# Altium PCB 3S Battery PCB.PcbDoc
Units mm, origin at the board's own origin, x right, y up, seen from the top; angles counter-clockwise.
Board outline 40 x 35 mm, 2 copper layers (Top Layer, Bottom Layer), stack 1.671 mm thick; 27 components, 18 nets, 89 pads, 8 vias.
Unrouted connection lines stored in the file: 1.
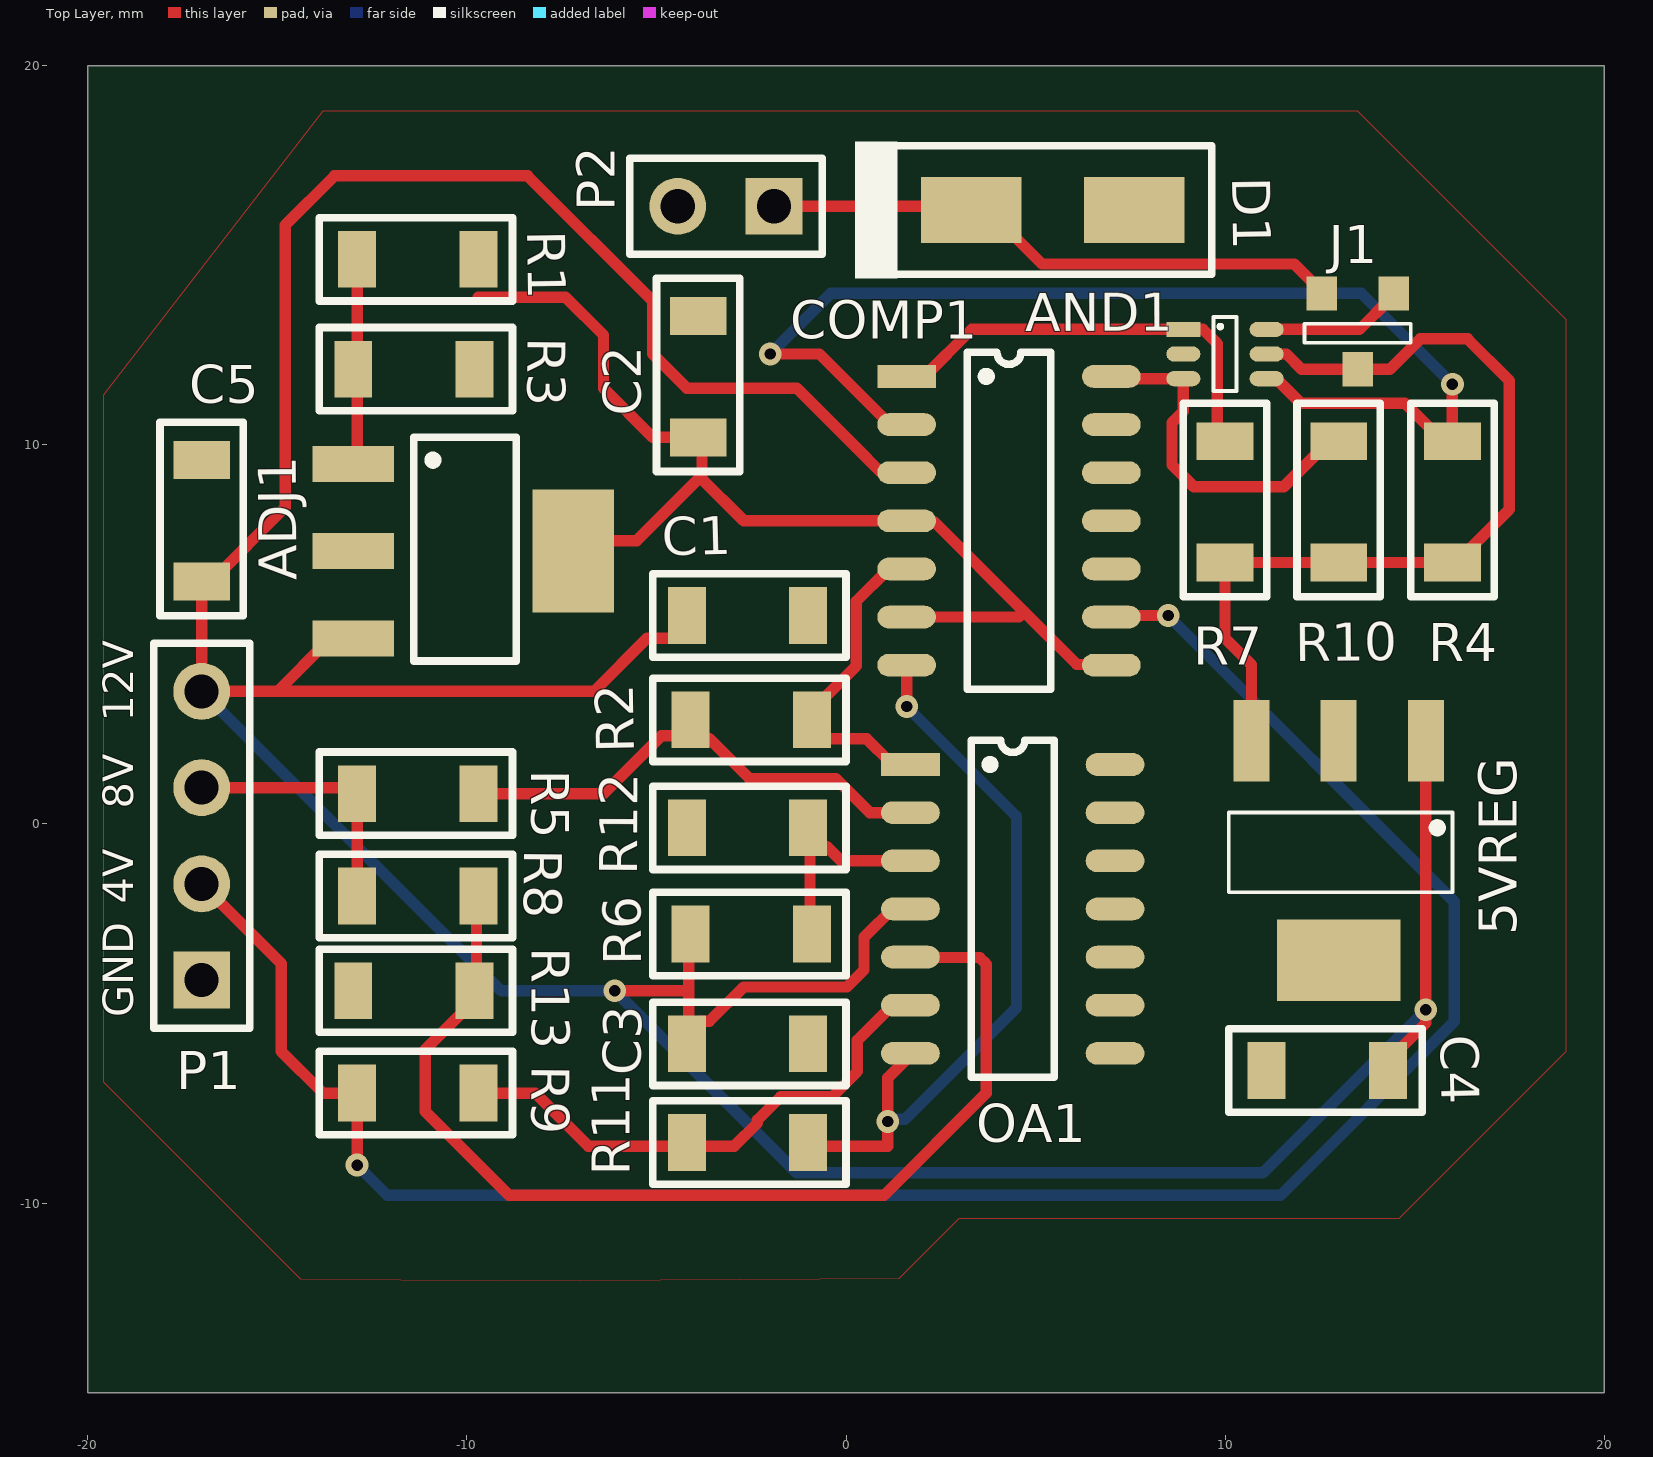
[diagram p0: Top Layer view]
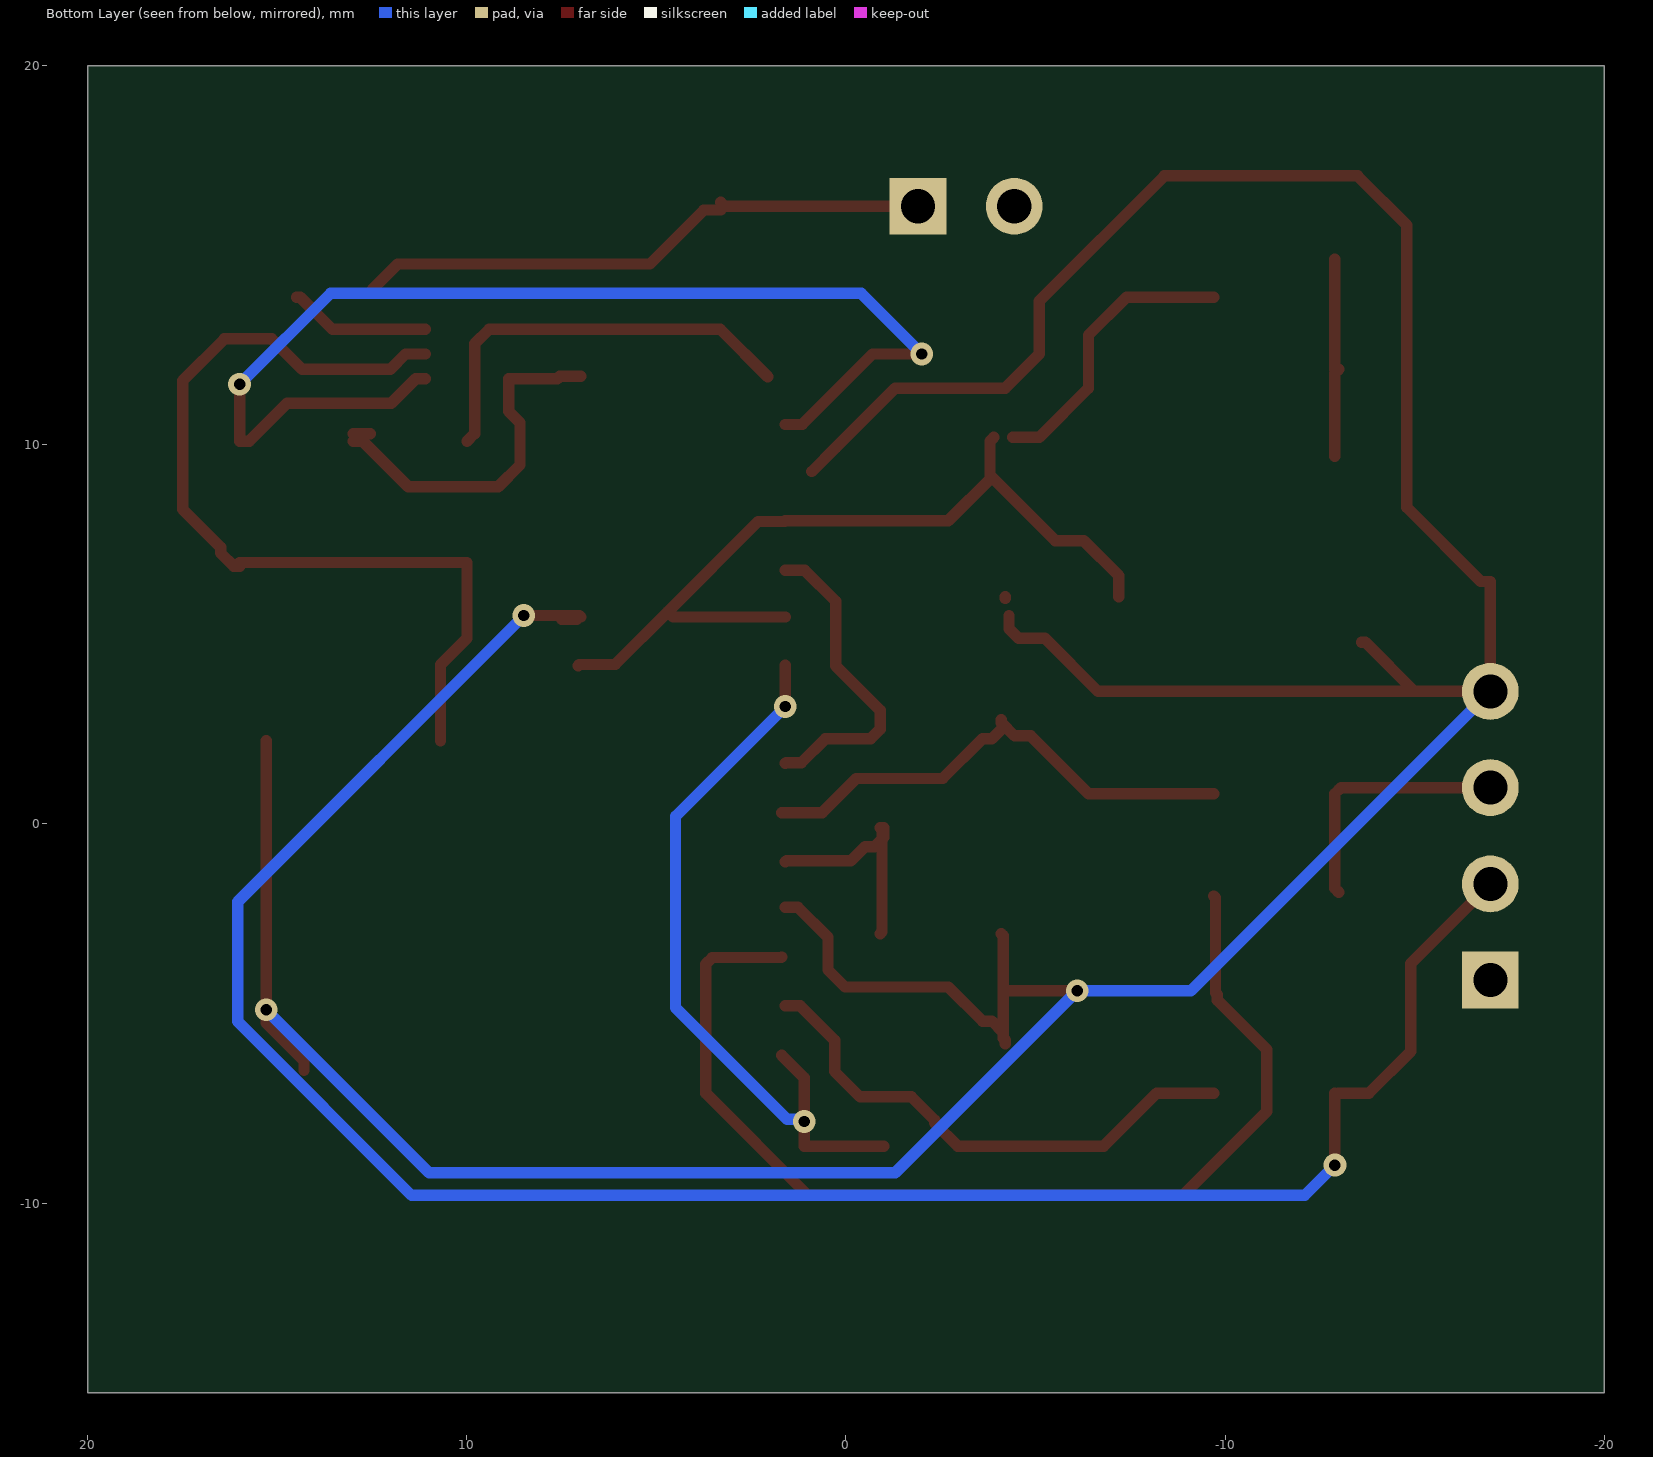
[diagram p1: Bottom Layer view, seen from below]
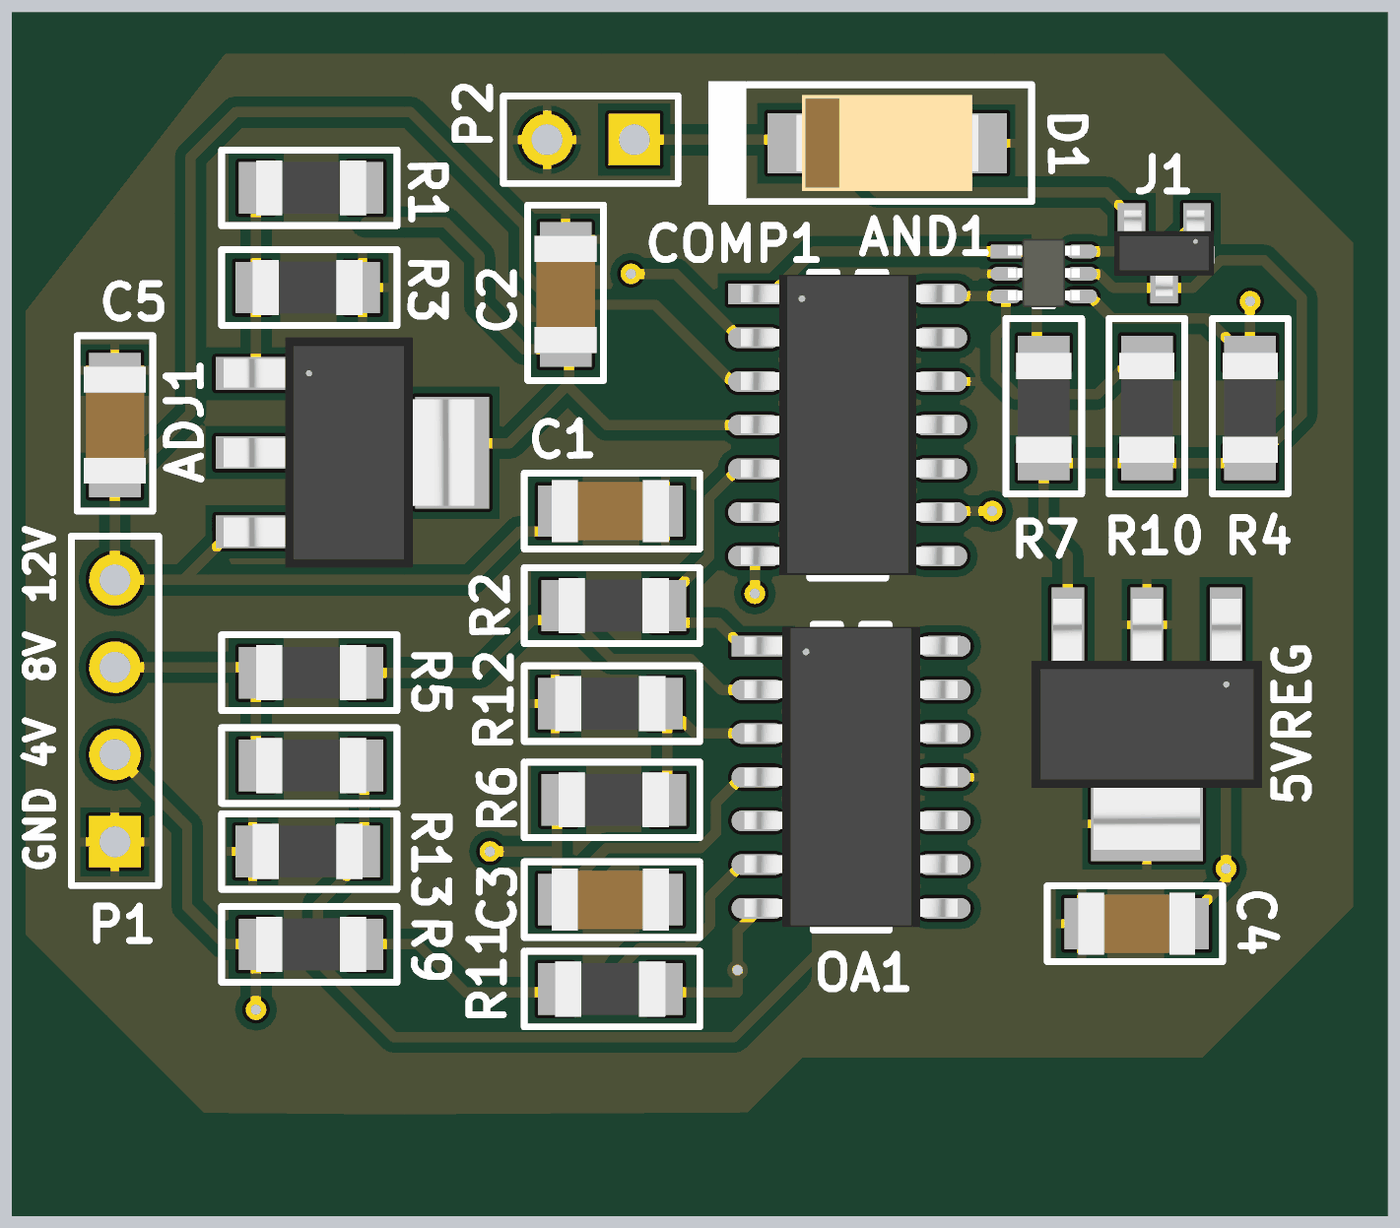
[diagram p2: 3D render of the assembled board from above, using the file's embedded part models]

## Layer stack, top to bottom
Top Solder: solder mask 0.0102, Solder Resist, Dk 3.5
Top Layer: signal copper 0.0356
Dielectric 1: dielectric 1.6, FR-4, Dk 4.8
Bottom Layer: signal copper 0.0356
Bottom Solder: solder mask 0.0102, Solder Resist, Dk 3.5

## Board outline
-20,20 -20,-15 20,-15 20,20

## Design rules (kind name [scope] priority, off if disabled: settings)
Clearance [All] p1: gap=0.3 ignorepadtopadclearanceinfootprint=FALSE
PolygonConnect [All] p1: connectstyle=Relief reliefconductorwidth=0.254 reliefentries=4 polygonreliefangle="90 Angle" airgapwidth=0.254
RoutingVias [All] p1: holewidth=0.3 width=0.6 viastyle="Through Hole" minholewidth=0.3 minwidth=0.6 maxholewidth=0.3 maxwidth=0.6
SolderMaskExpansion [All] p1: expansion=0.102 istentingtop=FALSE
Width [All] p1: maxlimit=1 minlimit=0.3 preferedwidth=0.5
30 further rules are at their usual default settings.

## Components (designator, comment, footprint, x,y, rotation, side; value= is the part's Value field where it differs from the comment)
5VREG "5V REG" 5VREG 13,2.2 r180 top
ADJ1 "ADJ REG" ADJREG -13,7.2 r270 top
AND1 "AND GATE" AND3 8.9,13.05 r0 top
C1 "0.1uF" C1206 -2.6,5.5 r180 top
C2 "1uF" C1206 -3.9,11.8 r270 top
C3 "0.1uF" C1206 -2.6,-5.8 r180 top
C4 "0.1uF" C1206 12.7,-6.5 r0 top
C5 "0.1uF" C1206 -17,8 r270 top
COMP1 "COMPARATOR" Comparator 1.6,11.81 r0 top
D1 "Diode" Diode 5.45,16.2 r180 top
J1 "FET" MOSFET 13.5,12 r180 top
OA1 "OP-AMP" OP_AMP 1.7,1.57 r0 top
P1 "Header 4" HDR1X4 -17,-4.12 r90 top
P2 "Relay" HDR1X2 -1.9,16.3 r180 top
R1 "330R" R1206 -11.3,14.9 r0 top
R2 "1K" R1206 -2.5,2.75 r0 top
R3 "620R" R1206 -11.4,12 r180 top
R4 "47K" R1206 16,8.5 r270 top
R5 "1K" R1206 -11.3,0.8 r0 top
R6 "1K" R1206 -2.5,-2.9 r0 top
R7 "47K" R1206 10,8.5 r270 top
R8 "1K" R1206 -11.3,-1.9 r0 top
R9 "1K" R1206 -11.3,-7.1 r0 top
R10 "47K" R1206 13,8.5 r270 top
R11 "1K" R1206 -2.6,-8.4 r180 top
R12 "1K" R1206 -2.6,-0.1 r180 top
R13 "1K" R1206 -11.4,-4.4 r180 top

## Footprints (in the part's own frame and the unit in brackets; to place one, negate y for a bottom-side part, rotate by r counter-clockwise, add the part's x,y. Pads: shape width x height; smd on the part's side, far side on the other; paste and mask are expansions set on the pad)
5VREG [mm]
  rect 0.95x2.15 smd: 1(-2.3,0) 2(0,0) 3(2.3,0)
  rect 3.25x2.15 smd: 4(0,5.8)
  silkscreen extent -3,1.9 2.9,4, body extent -3.35,-0.74 3.35,6.55, height 1.7
ADJREG [mm]
  rect 0.95x2.15 smd: 1(-2.3,0) 2(0,0) 3(2.3,0)
  rect 3.25x2.15 smd: 4(0,5.8)
  silkscreen extent -3,1.6 2.9,4.3, body extent -3.35,-0.84 3.35,6.45, height 1.7
AND3 [mm]
  rect 0.9x0.4 smd: 1(0,0)
  oval 0.9x0.4 smd: 2(0,-0.65) 3(0,-1.3) 4(2.2,-1.3) 5(2.2,-0.65) 6(2.2,0)
  silkscreen extent 0.8,-1.63 1.4,0.33, body extent 0.05,-1.62 2.15,0.38, height 1
C1206 [mm]
  rect 1x1.5 smd: 1(-1.6,0) 2(1.6,0)
  silkscreen extent -2.6,-1.1 2.5,1.1, body extent -1.7,-0.9 1.7,0.9, height 0.88
Comparator [mm]
  rect 1.55x0.6 smd: 1(0,0)
  oval 1.55x0.6 smd: 2(0,-1.27) 3(0,-2.54) 4(0,-3.81) 5(0,-5.08) 6(0,-6.35) 7(0,-7.62) 8(5.4,-7.62) 9(5.4,-6.35) 10(5.4,-5.08) 11(5.4,-3.81) 12(5.4,-2.54) 13(5.4,-1.27) 14(5.4,0)
  silkscreen extent 1.6,-8.25 3.8,0.64, body extent -0.4,-8.17 5.8,0.57, height 1.76
Diode [mm]
  rect 2.65x1.75 smd: 1(2.15,0) 2(-2.15,0)
  silkscreen extent -4.2,-1.8 5.2,1.8, body extent -2.64,-1.4 2.64,1.4, height 2.34
HDR1X2 [mm] "Connector; Header; 2 Position"
  rect 1.5x1.5 hole 0.9: 1(0,0)
  round 1.5 hole 0.9: 2(2.54,0)
  silkscreen extent -1.27,-1.27 3.81,1.27
HDR1X4 [mm] "Connector; Header; 4 Position"
  rect 1.5x1.5 hole 0.9: 1(0,0)
  round 1.5 hole 0.9: 2(2.54,0) 3(5.08,0) 4(7.62,0)
  silkscreen extent -1.27,-1.27 8.89,1.27
MOSFET [mm]
  rect 0.8x0.9 smd: 1(-0.95,-2) 2(0,0) 3(0.95,-2)
  silkscreen extent -1.4,-1.2 1.4,-0.7, body extent -1.45,-2.24 1.45,0.25, height 1.09
OP_AMP [mm]
  rect 1.55x0.6 smd: 1(0,0)
  oval 1.55x0.6 smd: 2(0,-1.27) 3(0,-2.54) 4(0,-3.81) 5(0,-5.08) 6(0,-6.35) 7(0,-7.62) 8(5.4,-7.62) 9(5.4,-6.35) 10(5.4,-5.08) 11(5.4,-3.81) 12(5.4,-2.54) 13(5.4,-1.27) 14(5.4,0)
  silkscreen extent 1.6,-8.25 3.8,0.64, body extent -0.4,-8.17 5.8,0.57, height 1.76
R1206 [mm]
  rect 1x1.5 smd: 1(-1.6,0) 2(1.6,0)
  silkscreen extent -2.6,-1.1 2.5,1.1, body extent -1.6,-0.8 1.6,0.8, height 0.71

## Part data
5VREG: library part LM7805MPX/NOPB, "IC REG LINEAR 5V 1.5A SOT223-4", Dropout Voltage=2V, Manufacturer="Texas Instruments", Max Operating Temperature=125°C, Min Operating Temperature=0°C, Quiescent Current=8mA, Supplier Part Number 1=296-44518-1-ND, Category="Voltage Regulators - Linear", Lead Free="Lead Free", Manufacturer Part Number=LM7805MPX/NOPB, Pricing 1="1=1.32000, 10=1.18000, 25=1.12000, 100=0.86000, 250=0.76000, 500=0.72000, 1000=0.56000 (USD)", RoHS=No, Stock 1=3420, Supplier 1=Digi-Key
ADJ1: library part LM317DCYR, "TEXAS INSTRUMENTS - LM317DCYR - LINEAR VOLT REG, 1.5A, 1.25V-37V, SOT223", Case/Package=SOT-223, Dropout Voltage=2V, Manufacturer="Texas Instruments", Max Input Voltage=40V, Max Operating Temperature=125°C, Max Output Current=1.5A, Max Output Voltage=37V, Min Input Voltage=4.2V, Min Operating Temperature=0°C, Min Output Voltage=1.25V, Package Quantity=1, Power Supply Rejection Ratio (PSRR)=64dB, Quiescent Current=3.5mA, Reference Voltage=1.3V, Supplier Part Number 1=296-12602-1-ND, Category="Voltage Regulators - Linear", ComponentLink1Description=https://datasheet.ciiva.com/2042/lm317-2042144.pdf?src-supplier=Digi-Key, ComponentLink1URL=https://datasheet.ciiva.com/2042/lm317-2042144.pdf?src-supplier=Digi-Key, ComponentLink2Description=https://datasheet.ciiva.com/4882/slvs044u-120651-4882417.pdf?src-supplier=Mouser, ComponentLink2URL=https://datasheet.ciiva.com/4882/slvs044u-120651-4882417.pdf?src-supplier=Mouser, ComponentLink3Description=https://datasheet.ciiva.com/41458/001014031-da-01-en-ic-reg-adj-1-5a-lm317dcyr-sot-223-4-tid-41458183.pdf?src-supplier=Conrad, ComponentLink3URL=https://datasheet.ciiva.com/41458/001014031-da-01-en-ic-reg-adj-1-5a-lm317dcyr-sot-223-4-tid-41458183.pdf?src-supplier=Conrad, ComponentLink4Description=https://datasheet.ciiva.com/2042/lm317-2042145.pdf?src-supplier=Digi-Key, ComponentLink4URL=https://datasheet.ciiva.com/2042/lm317-2042145.pdf?src-supplier=Digi-Key, ComponentLink5Description=https://datasheet.ciiva.com/2042/lm317-2042146.pdf?src-supplier=Digi-Key, ComponentLink5URL=https://datasheet.ciiva.com/2042/lm317-2042146.pdf?src-supplier=Digi-Key, ComponentLink6Description=https://datasheet.ciiva.com/46385/1885815-46385689.pdf?src-supplier=Element14, ComponentLink6URL=https://datasheet.ciiva.com/46385/1885815-46385689.pdf?src-supplier=Element14, Contact Plating=Tin,Matte, Height=1.6mm, Lead Free="Lead Free", Length=6.5mm, Manufacturer Part Number=LM317DCYR, Mount="Surface Mount", Number of Outputs=1, Number of Pins=4, Number of Regulators=1, Output Current=1.5A, Output Type=Adjustable, Output Voltage=37V, Packaging="Tape and Reel", Polarity=Positive, Pricing 1="1=0.60000, 10=0.52800, 25=0.49600, 100=0.37600, 250=0.32000, 500=0.30400, 1000=0.23200 (USD)", Radiation Hardening=No, REACH SVHC="No SVHC", RoHS=Yes, Stock 1=100644, Supplier 1=Digi-Key, Weight=0.006632oz, Width=3.5mm
AND1: library part SN74LVC1G11DCKR, "IC GATE AND 1CH 3-INP SC-70-6", Case/Package=SC, High Level Output Current=-32mA, Low Level Output Current=32mA, Manufacturer="Texas Instruments", Max Operating Temperature=125°C, Max Supply Voltage=5.5V, Min Operating Temperature=-40°C, Min Supply Voltage=1.65V, Package Quantity=1, Quiescent Current=10uA, Supplier Part Number 1=296-18066-1-ND, Category="Logic Gates", ComponentLink1Description=https://datasheet.ciiva.com/4216/901sn74lvc1g11-4216653.pdf?src-supplier=Arrow, ComponentLink1URL=https://datasheet.ciiva.com/4216/901sn74lvc1g11-4216653.pdf?src-supplier=Arrow, ComponentLink2Description=https://datasheet.ciiva.com/34301/756561-34301472.pdf?src-supplier=Jameco, ComponentLink2URL=https://datasheet.ciiva.com/34301/756561-34301472.pdf?src-supplier=Jameco, ComponentLink3Description=https://datasheet.ciiva.com/15090/getdatasheetpartid-173081-15090972.pdf?src-supplier=Verical, ComponentLink3URL=https://datasheet.ciiva.com/15090/getdatasheetpartid-173081-15090972.pdf?src-supplier=Verical, ComponentLink4Description=https://datasheet.ciiva.com/14290/sn74lvc1g11-14290749.pdf?src-supplier=Avnet, ComponentLink4URL=https://datasheet.ciiva.com/14290/sn74lvc1g11-14290749.pdf?src-supplier=Avnet, ComponentLink5Description=https://datasheet.ciiva.com/1864/sn74lvc1g11-1864149.pdf?src-supplier=Digi-Key, ComponentLink5URL=https://datasheet.ciiva.com/1864/sn74lvc1g11-1864149.pdf?src-supplier=Digi-Key, ComponentLink6Description=https://datasheet.ciiva.com/1864/sn74lvc1g11-1864150.pdf?src-supplier=Digi-Key, ComponentLink6URL=https://datasheet.ciiva.com/1864/sn74lvc1g11-1864150.pdf?src-supplier=Digi-Key, ComponentLink7Description=https://datasheet.ciiva.com/1864/sn74lvc1g11-1864151.pdf?src-supplier=Digi-Key, ComponentLink7URL=https://datasheet.ciiva.com/1864/sn74lvc1g11-1864151.pdf?src-supplier=Digi-Key, ComponentLink8Description=https://datasheet.ciiva.com/26218/sn74lvc1g11-26218392.pdf?src-supplier=Avnet+Europe, ComponentLink8URL=https://datasheet.ciiva.com/26218/sn74lvc1g11-26218392.pdf?src-supplier=Avnet+Europe, ComponentLink9Description=https://datasheet.ciiva.com/7783/sn74lvc1g11-7783449.pdf?src-supplier=Element14, ComponentLink9URL=https://datasheet.ciiva.com/7783/sn74lvc1g11-7783449.pdf?src-supplier=Element14, ComponentLink10Description=https://datasheet.ciiva.com/28695/1882071-28695898.pdf?src-supplier=Element14, ComponentLink10URL=https://datasheet.ciiva.com/28695/1882071-28695898.pdf?src-supplier=Element14, ComponentLink11Description=https://datasheet.ciiva.com/46439/1856273-46439162.pdf?src-supplier=Element14, ComponentLink11URL=https://datasheet.ciiva.com/46439/1856273-46439162.pdf?src-supplier=Element14, ComponentLink12Description=https://datasheet.ciiva.com/46439/1856273-46439210.pdf?src-supplier=Element14, ComponentLink12URL=https://datasheet.ciiva.com/46439/1856273-46439210.pdf?src-supplier=Element14, Contact Plating=Gold, Height=0.9mm, Lead Free="Lead Free", Length=2mm, Logic Function=AND, Manufacturer Part Number=SN74LVC1G11DCKR, Mount="Surface Mount", Number of Bits=1, Number of Circuits=1, Number of Elements=1, Number of Gates=1, Number of Input Lines=3, Number of Inputs=3, Number of Output Lines=1, Number of Outputs=1, Number of Pins=6, Output Current=32mA, Packaging="Tape and Reel", Pricing 1="1=0.43000, 10=0.32000, 25=0.28000, 100=0.18120, 250=0.15000, 500=0.12000, 1000=0.09200 (USD)", Propagation Delay=3.5ns, Radiation Hardening=No, REACH SVHC="No SVHC", RoHS=Yes, Schmitt Trigger Input=No, Stock 1=75205, Supplier 1=Digi-Key, Turn-On Delay Time=4.9ns, Weight=8.8E-05oz, Width=1.25mm
C1 C3 C4 C5: library part C1206C104K5RAC-TU, "Kemet 0.1µF ±10% 50V dc X7R Dielectric SMD Ceramic Multilayer Capacitor; 1206 pa", Capacitance=100nF, Case Code (Imperial)=1206, Case Code (Metric)=3216, Dielectric=X7R, Dielectric Material=Ceramic, Manufacturer=KEMET, Max Operating Temperature=125°C, Min Operating Temperature=-55°C, Package Quantity=4000, Supplier Part Number 1=399-C1206C104K5RAC7800CT-ND, Tolerance=10%, Voltage=50V, Case/Package=1206, Category="Ceramic Capacitors", ComponentLink1Description=https://datasheet.ciiva.com/6125/1725438-6125494.pdf?src-supplier=Farnell, ComponentLink1URL=https://datasheet.ciiva.com/6125/1725438-6125494.pdf?src-supplier=Farnell, ComponentLink2Description=https://datasheet.ciiva.com/6125/kem-c1002-x7r-smd-6125493.pdf?src-supplier=Farnell, ComponentLink2URL=https://datasheet.ciiva.com/6125/kem-c1002-x7r-smd-6125493.pdf?src-supplier=Farnell, ComponentLink3Description=https://datasheet.ciiva.com/14584/70095383-14584998.pdf?src-supplier=Allied+Electronics, ComponentLink3URL=https://datasheet.ciiva.com/14584/70095383-14584998.pdf?src-supplier=Allied+Electronics, ComponentLink4Description=https://datasheet.ciiva.com/6094/kem-c1002-x7r-smd-6094137.pdf?src-supplier=Farnell, ComponentLink4URL=https://datasheet.ciiva.com/6094/kem-c1002-x7r-smd-6094137.pdf?src-supplier=Farnell, ComponentLink5Description=https://datasheet.ciiva.com/14589/70095383-14589050.pdf?src-supplier=Allied+Electronics, ComponentLink5URL=https://datasheet.ciiva.com/14589/70095383-14589050.pdf?src-supplier=Allied+Electronics, ComponentLink6Description=https://datasheet.ciiva.com/7729/1851736-7729804.pdf?src-supplier=Element14, ComponentLink6URL=https://datasheet.ciiva.com/7729/1851736-7729804.pdf?src-supplier=Element14, ComponentLink7Description=https://datasheet.ciiva.com/7730/kem-c1002-x7r-smd-7730076.pdf?src-supplier=Element14, ComponentLink7URL=https://datasheet.ciiva.com/7730/kem-c1002-x7r-smd-7730076.pdf?src-supplier=Element14, ComponentLink8Description=https://datasheet.ciiva.com/7729/1851736-7729805.pdf?src-supplier=Element14, ComponentLink8URL=https://datasheet.ciiva.com/7729/1851736-7729805.pdf?src-supplier=Element14, ComponentLink9Description=https://datasheet.ciiva.com/7730/kem-c1002-x7r-smd-7730077.pdf?src-supplier=Element14, ComponentLink9URL=https://datasheet.ciiva.com/7730/kem-c1002-x7r-smd-7730077.pdf?src-supplier=Element14, ComponentLink10Description=https://datasheet.ciiva.com/32426/slceramic-chip-condensers-e-32426463.pdf?src-supplier=Distrelec, ComponentLink10URL=https://datasheet.ciiva.com/32426/slceramic-chip-condensers-e-32426463.pdf?src-supplier=Distrelec, ComponentLink11Description=https://datasheet.ciiva.com/5423/kem-c1002-x7r-smd-5423254.pdf?src-supplier=Mouser, ComponentLink11URL=https://datasheet.ciiva.com/5423/kem-c1002-x7r-smd-5423254.pdf?src-supplier=Mouser, ComponentLink12Description=https://datasheet.ciiva.com/28682/1851736-28682249.pdf?src-supplier=Element14, ComponentLink12URL=https://datasheet.ciiva.com/28682/1851736-28682249.pdf?src-supplier=Element14, Contact Plating=Tin,Matte, Depth=1.6mm, Height=0.78mm, Length=3.2mm, Manufacturer Part Number=C1206C104K5RAC-TU, Mount="Surface Mount", Number of Pins=2, Packaging="Tape and Reel", Pricing 1="1=0.12000, 10=0.08400, 50=0.04760, 100=0.03950, 500=0.02768, 1000=0.02291 (USD)", Radiation Hardening=No, REACH SVHC="No SVHC", RoHS=Yes, Stock 1=1706426, Supplier 1=Digi-Key, Termination=SMD/SMT, Voltage Rating=50V, Voltage Rating (DC)=50V, Width=1.6mm
C2: library part C1206C105M4RACTU, "KEMET         C1206C105M4RACTU             SMD Multilayer Ceramic Capacitor, 1206 [3216 Metric], 1 F, 16 V,  20%, X7R, C Series                          New", Case Code (Imperial)=1206, Case Code (Metric)=3216, Dielectric=X7R, Dielectric Material=Ceramic, Manufacturer=KEMET, Max Operating Temperature=125°C, Min Operating Temperature=-55°C, Package Quantity=1, Supplier Part Number 1=399-8150-1-ND, Tolerance=20%, Voltage Rating=16V, Capacitance=1uF, Case/Package=1206, Category="Ceramic Capacitors", ComponentLink1Description=http://components.arrow.com/part/dataview/0323_00341530?src-supplier=Arrow+Europe, ComponentLink1URL=http://components.arrow.com/part/dataview/0323_00341530?src-supplier=Arrow+Europe, ComponentLink2Description=http://www.farnell.com/datasheets/2746114.pdf?src-supplier=Farnell, ComponentLink2URL=http://www.farnell.com/datasheets/2746114.pdf?src-supplier=Farnell, ComponentLink3Description=http://www.mouser.com/ds/2/212/KEM_C1002_X7R_SMD-1102033.pdf?src-supplier=Mouser, ComponentLink3URL=http://www.mouser.com/ds/2/212/KEM_C1002_X7R_SMD-1102033.pdf?src-supplier=Mouser, ComponentLink4Description=http://www.farnell.com/datasheets/2746114.pdf?src-supplier=Newark, ComponentLink4URL=http://www.farnell.com/datasheets/2746114.pdf?src-supplier=Newark, ComponentLink5Description=http://www.farnell.com/datasheets/1828800.pdf?src-supplier=Newark, ComponentLink5URL=http://www.farnell.com/datasheets/1828800.pdf?src-supplier=Newark, ComponentLink6Description=https://api.kemet.com/component-edge/download/datasheet/C1206C105M4RACTU.pdf?src-supplier=Digi-Key, ComponentLink6URL=https://api.kemet.com/component-edge/download/datasheet/C1206C105M4RACTU.pdf?src-supplier=Digi-Key, ComponentLink7Description=http://components.arrow.com/part/dataview/2096582S3494707N7429?src-supplier=Arrow, ComponentLink7URL=http://components.arrow.com/part/dataview/2096582S3494707N7429?src-supplier=Arrow, ComponentLink8Description=https://search.kemet.com/component-edge/download/datasheet/C1206C105M4RACTU.pdf?src-supplier=Digi-Key, ComponentLink8URL=https://search.kemet.com/component-edge/download/datasheet/C1206C105M4RACTU.pdf?src-supplier=Digi-Key, ComponentLink9Description=https://www.verical.com/server-webapp/html/getDatasheet?partID=110809&src-supplier=Verical, ComponentLink9URL=https://www.verical.com/server-webapp/html/getDatasheet?partID=110809&src-supplier=Verical, ComponentLink10Description=http://www.farnell.com/datasheets/2065007.pdf?src-supplier=Element14, ComponentLink10URL=http://www.farnell.com/datasheets/2065007.pdf?src-supplier=Element14, Depth=1.6mm, Height=1.2mm, Length=3.2mm, Manufacturer Part Number=C1206C105M4RACTU, Mount="Surface Mount", Packaging="Tape and Reel", Pricing 1="1=0.19000, 10=0.12600, 50=0.07560, 100=0.06390, 500=0.04372, 1000=0.03868 (USD)", Radiation Hardening=No, REACH SVHC="No SVHC", RoHS=Yes, Stock 1=36978, Supplier 1=Digi-Key, Termination=SMD/SMT, Thickness=0.055inch, Voltage Rating (DC)=16V, Width=0.063inch
COMP1: library part LM339DR, "Comparator Quad 15V/30V 14-Pin SOIC T/R", Case/Package=SOIC, Input Bias Current=250nA, Input Offset Voltage (Vos)=5mV, Manufacturer="Texas Instruments", Max Dual Supply Voltage=15V, Max Operating Temperature=70°C, Max Supply Current=500uA, Max Supply Voltage=30V, Min Dual Supply Voltage=1V, Min Operating Temperature=0°C, Min Supply Voltage=2V, Nominal Supply Current=2mA, Output Current=20mA, Output Current per Channel=6mA, Package Quantity=2500, Quiescent Current=2.5mA, Supplier Part Number 1=296-1013-1-ND, Voltage Gain=106.02dB, Category="Amplifiers - Op Amps, Buffer, Instrumentation", ComponentLink1Description=https://datasheet.ciiva.com/15131/getdatasheetpartid-242797-15131064.pdf?src-supplier=Verical, ComponentLink1URL=https://datasheet.ciiva.com/15131/getdatasheetpartid-242797-15131064.pdf?src-supplier=Verical, ComponentLink2Description=https://datasheet.ciiva.com/34301/902741-34301710.pdf?src-supplier=Jameco, ComponentLink2URL=https://datasheet.ciiva.com/34301/902741-34301710.pdf?src-supplier=Jameco, ComponentLink3Description=https://datasheet.ciiva.com/2970/lm2901-2970486.pdf?src-supplier=Avnet, ComponentLink3URL=https://datasheet.ciiva.com/2970/lm2901-2970486.pdf?src-supplier=Avnet, ComponentLink4Description=https://datasheet.ciiva.com/2970/lm2901-2970487.pdf?src-supplier=Avnet, ComponentLink4URL=https://datasheet.ciiva.com/2970/lm2901-2970487.pdf?src-supplier=Avnet, ComponentLink5Description=https://datasheet.ciiva.com/46390/1874704-46390521.pdf?src-supplier=Element14, ComponentLink5URL=https://datasheet.ciiva.com/46390/1874704-46390521.pdf?src-supplier=Element14, ComponentLink6Description=https://datasheet.ciiva.com/1483/1633630-1483053.pdf?src-supplier=Element14, ComponentLink6URL=https://datasheet.ciiva.com/1483/1633630-1483053.pdf?src-supplier=Element14, ComponentLink7Description=https://datasheet.ciiva.com/1827/lm139a-1827181.pdf?src-supplier=Digi-Key, ComponentLink7URL=https://datasheet.ciiva.com/1827/lm139a-1827181.pdf?src-supplier=Digi-Key, ComponentLink8Description=https://datasheet.ciiva.com/1827/lm139a-1827182.pdf?src-supplier=Digi-Key, ComponentLink8URL=https://datasheet.ciiva.com/1827/lm139a-1827182.pdf?src-supplier=Digi-Key, ComponentLink9Description=https://datasheet.ciiva.com/1827/lm139a-1827183.pdf?src-supplier=Digi-Key, ComponentLink9URL=https://datasheet.ciiva.com/1827/lm139a-1827183.pdf?src-supplier=Digi-Key, ComponentLink10Description=https://datasheet.ciiva.com/16464/lm2901-16464303.pdf?src-supplier=Avnet+Asia, ComponentLink10URL=https://datasheet.ciiva.com/16464/lm2901-16464303.pdf?src-supplier=Avnet+Asia, ComponentLink11Description=https://datasheet.ciiva.com/48711/001072944-da-01-en-ic-quad-diff-comp-lm339dr-soic-14-tid-48711414.pdf?src-supplier=Conrad, ComponentLink11URL=https://datasheet.ciiva.com/48711/001072944-da-01-en-ic-quad-diff-comp-lm339dr-soic-14-tid-48711414.pdf?src-supplier=Conrad, Contact Plating=Gold, Lead Free="Lead Free", Manufacturer Part Number=LM339DR, Max Input Current=250nA, Mount="Surface Mount", Number of Channels=4, Number of Elements=4, Number of Pins=14, Output Type=TTL, Packaging="Tape and Reel", Pricing 1="1=0.38000, 10=0.28700, 25=0.25840, 100=0.14100, 250=0.13632, 500=0.12220, 1000=0.09400 (USD)", Radiation Hardening=No, REACH SVHC="No SVHC", Response Time=1.3us, RoHS=Yes, Stock 1=39253, Supplier 1=Digi-Key, Weight=0.004318oz
D1: library part S1B, "ON SEMICONDUCTOR - S1B - Standard Recovery Diode, General Purpose, 100 V, 1 A, Single, 1.1 V, 1.8 µs, 30 A", Average Rectified Current=1A, Capacitance=12pF, Case/Package=SMA, Forward Voltage=1.1V, Manufacturer="ON Semiconductor / Fairchild", Max Forward Surge Current (Ifsm)=30A, Max Operating Temperature=150°C, Max Repetitive Reverse Voltage (Vrrm)=100V, Max Surge Current=40A, Min Operating Temperature=-55°C, Package Quantity=1, Peak Reverse Current=1uA, Power Dissipation=1.4W, Supplier Part Number 1=S1BFSCT-ND, Category="Rectifier Diodes", ComponentLink1Description=https://datasheet.ciiva.com/4452/s1b-196602-4452914.pdf?src-supplier=Mouser, ComponentLink1URL=https://datasheet.ciiva.com/4452/s1b-196602-4452914.pdf?src-supplier=Mouser, ComponentLink2Description=https://datasheet.ciiva.com/25624/0900766b810e25be-25624908.pdf?src-supplier=RSComponents, ComponentLink2URL=https://datasheet.ciiva.com/25624/0900766b810e25be-25624908.pdf?src-supplier=RSComponents, ComponentLink3Description=https://datasheet.ciiva.com/916/s1a-916901.pdf?src-supplier=Digi-Key, ComponentLink3URL=https://datasheet.ciiva.com/916/s1a-916901.pdf?src-supplier=Digi-Key, ComponentLink4Description=https://datasheet.ciiva.com/916/s1a-916902.pdf?src-supplier=Digi-Key, ComponentLink4URL=https://datasheet.ciiva.com/916/s1a-916902.pdf?src-supplier=Digi-Key, ComponentLink5Description=https://datasheet.ciiva.com/916/s1a-916903.pdf?src-supplier=Digi-Key, ComponentLink5URL=https://datasheet.ciiva.com/916/s1a-916903.pdf?src-supplier=Digi-Key, Contact Plating=Tin,Matte, Current Rating=1A, Element Configuration=Single, Forward Current=1A, Height=2.2mm, Lead Free="Lead Free", Length=4.75mm, Manufacturer Part Number=S1B, Max Reverse Voltage (DC)=100V, Mount="Surface Mount", Number of Pins=2, Output Current=1A, Packaging="Tape and Reel", Peak Non-Repetitive Surge Current=30A, Polarity=Standard, Pricing 1="1=0.24000, 10=0.19200, 25=0.16120, 100=0.07880, 500=0.06570, 1000=0.04565, 2500=0.04242 (USD)", Radiation Hardening=No, REACH SVHC="No SVHC", Recovery Time=1800ns, Reverse Recovery Time=1.8us, Reverse Voltage=100V, RoHS=Yes, Stock 1=104255, Supplier 1=Digi-Key, Voltage Rating (DC)=100V, Weight=0.106g, Width=2.95mm
J1: library part DMN65D8L-7, "N-Channel Enhancement MOSFET SOT-23", Case/Package=SOT-23, Continuous Drain Current (ID)=310mA, Drain to Source Breakdown Voltage=60V, Drain to Source Resistance=2R, Gate to Source Voltage (Vgs)=20V, Input Capacitance=22pF, Manufacturer=Diodes, Max Operating Temperature=150°C, Max Power Dissipation=370mW, Min Operating Temperature=-55°C, Package Quantity=1, Power Dissipation=540mW, Supplier Part Number 1=DMN65D8L-7DICT-ND, Threshold Voltage=2V, Category=MOSFETs, ComponentLink1Description=https://datasheet.ciiva.com/6371/dmn65d8l-6371124.pdf?src-supplier=Digi-Key, ComponentLink1URL=https://datasheet.ciiva.com/6371/dmn65d8l-6371124.pdf?src-supplier=Digi-Key, ComponentLink2Description=https://datasheet.ciiva.com/13058/dmn65d8l-219098-13058455.pdf?src-supplier=Mouser, ComponentLink2URL=https://datasheet.ciiva.com/13058/dmn65d8l-219098-13058455.pdf?src-supplier=Mouser, ComponentLink3Description=https://datasheet.ciiva.com/6371/dmn65d8l-6371126.pdf?src-supplier=Digi-Key, ComponentLink3URL=https://datasheet.ciiva.com/6371/dmn65d8l-6371126.pdf?src-supplier=Digi-Key, ComponentLink4Description=https://datasheet.ciiva.com/6371/dmn65d8l-6371128.pdf?src-supplier=Digi-Key, ComponentLink4URL=https://datasheet.ciiva.com/6371/dmn65d8l-6371128.pdf?src-supplier=Digi-Key, Drain to Source Voltage (Vdss)=60V, Element Configuration=Single, FET Type="1 N-Channel", Height=1.1mm, Lead Free="Lead Free", Length=3mm, Manufacturer Part Number=DMN65D8L-7, Mount="Surface Mount", Number of Channels=1, Number of Elements=1, Number of Pins=3, Packaging="Tape and Reel", Pricing 1="1=0.17000, 10=0.15100, 25=0.14400, 100=0.06330, 250=0.06076, 500=0.04972, 1000=0.03453 (USD)", Rds On Max=3R, REACH SVHC="No SVHC", Rise Time=2.8ns, RoHS=Yes, Stock 1=514497, Supplier 1=Digi-Key, Turn-Off Delay Time=12.6ns, Turn-On Delay Time=2.7ns, Weight=0.000282oz, Width=1.4mm
OA1: library part LMC660CMX/NOPB, "OP AMP, 1.4MHZ, 1.1V/uS, SOIC-14; Bandwidth:1.4MHz; No. of Amplifiers:4; Slew Rate:1.1V/ s; Supply Voltage Range:5V to 15.5V; Amplifier Case Style:SOIC; No. of Pins:14; Operating Temperature Min:0 C; Operating Temperature Max:70 C ;RoHS Compliant: Yes", Case/Package=SOIC, Input Bias Current=2pA, Input Offset Voltage (Vos)=6.3mV, Manufacturer="TI National Semiconductor", Max Operating Temperature=85°C, Max Supply Voltage=15.5V, Min Operating Temperature=-40°C, Min Supply Voltage=4.75V, Nominal Supply Current=1.5mA, Output Current=40mA, Package Quantity=2500, Power Supply Rejection Ratio (PSRR)=63dB, Supplier Part Number 1=LMC660CMX/NOPBCT-ND, Voltage Gain=126.02dB, Bandwidth=1.4MHz, Category="Amplifiers - Op Amps, Buffer, Instrumentation", Common Mode Rejection Ratio=63dB, ComponentLink1Description=https://datasheet.ciiva.com/6630/lmc660-6630774.pdf?src-supplier=Digi-Key, ComponentLink1URL=https://datasheet.ciiva.com/6630/lmc660-6630774.pdf?src-supplier=Digi-Key, ComponentLink2Description=https://datasheet.ciiva.com/6630/lmc660-6630775.pdf?src-supplier=Digi-Key, ComponentLink2URL=https://datasheet.ciiva.com/6630/lmc660-6630775.pdf?src-supplier=Digi-Key, ComponentLink3Description=https://datasheet.ciiva.com/6630/lmc660-6630776.pdf?src-supplier=Digi-Key, ComponentLink3URL=https://datasheet.ciiva.com/6630/lmc660-6630776.pdf?src-supplier=Digi-Key, Contact Plating=Tin, Gain Bandwidth Product=1.4MHz, Lead Free="Lead Free", Manufacturer Part Number=LMC660CMX/NOPB, Mount="Surface Mount", Number of Amplifiers=4, Number of Channels=4, Number of Circuits=4, Number of Elements=4, Number of Pins=14, Operating Supply Current=1.5mA, Output Current per Channel=40mA, Packaging="Tape and Reel", Pricing 1="1=2.19000, 10=1.96600, 25=1.85520, 100=1.48400, 250=1.29852, 500=1.26140, 1000=1.00170 (USD)", Radiation Hardening=No, REACH SVHC="No SVHC", RoHS=Yes, Slew Rate=1.1V/µs, Stock 1=11563, Supplier 1=Digi-Key, Unity Gain Bandwidth Product=1.4MHz
P1: "Header, 4-Pin", LatestRevisionDate=17-Jul-2002, LatestRevisionNote="Re-released for DXP Platform.", Publisher="Altium Limited"
P2: library part 22-29-2021, "Conn Wire to Board HDR 2 POS 2.54mm Solder ST Thru-Hole Bag", Color=White, Flammability Rating="UL94 V-0", Insulation Color=Natural, Manufacturer=Molex, Max Operating Temperature=80°C, Supplier Part Number 1=WM2744-ND, Voltage Rating (DC)=250V, Category=Connectors, ComponentLink1Description=https://datasheet.ciiva.com/70131/022292021-sd-70131706.pdf?src-supplier=Digi-Key, ComponentLink1URL=https://datasheet.ciiva.com/70131/022292021-sd-70131706.pdf?src-supplier=Digi-Key, Connector Type="Header,Male Pin", Contact Material=Brass, Contact Mating Length=0.295inch, Contact Plating=Gold, Contact Post Length=0.14inch, Contact Shape=Square, Fastening Type=Friction, Gender=Male, Glow Wire Compliant=Non-compliant, Halogen Free="Low Halogen", Insulation Height=0.461inch, Insulation Material=Nylon, Lead Free="Lead Free", Manufacturer Part Number=22-29-2021, Mount="Through Hole", Number of Positions=2, Number of Rows=1, Packaging=Bag, Pricing 1="1=0.48000, 10=0.45200, 100=0.31630, 500=0.27112, 1000=0.22593, 5000=0.19365, 10000=0.18074 (USD)", RoHS=Yes, Stock 1=6742, Supplier 1=Digi-Key, Termination=Solder
R1: library part RC1206FR-07330RL, "Surface Mount Thick Film Resistor, RC Series, 330 ohm, 250 mW, - 1%, 200 V, 1206 [3216 Metric]", Case Code (Imperial)=1206, Case Code (Metric)=3216, Manufacturer=Yageo, Max Operating Temperature=155°C, Min Operating Temperature=-55°C, Power Rating=250mW, Supplier Part Number 1=311-330FRCT-ND, Temperature Coefficient=100ppm/°C, Tolerance=1%, Voltage Rating=200V, Case/Package=1206, Category="Chip SMD Resistors", ComponentLink1Description=https://datasheet.ciiva.com/11819/0900766b80c6630a-11819921.pdf?src-supplier=RSComponents, ComponentLink1URL=https://datasheet.ciiva.com/11819/0900766b80c6630a-11819921.pdf?src-supplier=RSComponents, ComponentLink2Description=https://datasheet.ciiva.com/17422/pyu-rc1206-51-rohs-l-4-17422588.pdf?src-supplier=Future+Electronics, ComponentLink2URL=https://datasheet.ciiva.com/17422/pyu-rc1206-51-rohs-l-4-17422588.pdf?src-supplier=Future+Electronics, Composition="Thick Film", Depth=1.6mm, Height=0.55mm, Lead Free="Lead Free", Length=3.1mm, Manufacturer Part Number=RC1206FR-07330RL, Packaging="Tape and Reel", Pricing 1="1=0.10000, 10=0.06900, 100=0.02800, 1000=0.01259, 2500=0.01092 (USD)", REACH SVHC=Unknown, Resistance=330R, RoHS=Yes, Stock 1=22261, Supplier 1=Digi-Key, Termination=SMD/SMT
R2 R5 R6 R8 R9 R11 R12 R13: library part RC1206JR-071KL, "RES SMD 1K OHM 5% 1/4W 1206", Case Code (Imperial)=1206, Case Code (Metric)=3216, Manufacturer=Yageo, Max Operating Temperature=155°C, Max Power Dissipation=250mW, Min Operating Temperature=-55°C, Package Quantity=1, Resistance=1kR, Supplier Part Number 1=311-1.0KERDKR-ND, Temperature Coefficient=100ppm/°C, Tolerance=5%, Voltage Rating=200V, Case/Package=1206, Category="Chip SMD Resistors", ComponentLink1Description=https://datasheet.ciiva.com/2458/pyu-r-int-thick-7-2458672.pdf?src-supplier=Digi-Key, ComponentLink1URL=https://datasheet.ciiva.com/2458/pyu-r-int-thick-7-2458672.pdf?src-supplier=Digi-Key, ComponentLink2Description=https://datasheet.ciiva.com/2458/pyu-r-int-thick-7-2458673.pdf?src-supplier=Digi-Key, ComponentLink2URL=https://datasheet.ciiva.com/2458/pyu-r-int-thick-7-2458673.pdf?src-supplier=Digi-Key, ComponentLink3Description=https://datasheet.ciiva.com/2458/pyu-r-int-thick-7-2458671.pdf?src-supplier=Digi-Key, ComponentLink3URL=https://datasheet.ciiva.com/2458/pyu-r-int-thick-7-2458671.pdf?src-supplier=Digi-Key, Composition="Thick Film", Depth=1.6mm, Height=0.026inch, Lead Free="Lead Free", Length=3.1mm, Manufacturer Part Number=RC1206JR-071KL, Military Standard=Not, Number of Terminations=2, Packaging="Tape and Reel", Power Rating=250mW, Pricing 1="1=0.10000, 10=0.05900, 100=0.02400, 1000=0.01079, 2500=0.00936 (USD)", REACH SVHC=Unknown, RoHS=Yes, Stock 1=2065133, Supplier 1=Digi-Key, Termination=SMD/SMT, Width=0.063inch
R3: library part RMCF1206JT620R, "Res Thick Film 1206 620 Ohm 5% 1/4W ±200ppm/C Molded SMD Paper T/R", Case Code (Imperial)=1206, Case Code (Metric)=3216, Manufacturer="Stackpole Electronics", Max Operating Temperature=155°C, Max Power Dissipation=250mW, Min Operating Temperature=-55°C, Supplier Part Number 1=RMCF1206JT620RCT-ND, Temperature Coefficient=200ppm/°C, Tolerance=5%, Case/Package=1206, Category="Chip SMD Resistors", ComponentLink1Description=https://datasheet.ciiva.com/15193/getdatasheetpartid-659413-15193755.pdf?src-supplier=Verical, ComponentLink1URL=https://datasheet.ciiva.com/15193/getdatasheetpartid-659413-15193755.pdf?src-supplier=Verical, Composition="Thick Film", Contact Plating=Tin,Matte, Depth=1.6mm, Features="Automotive AEC-Q200", Height=0.028inch, Length=0.126inch, Manufacturer Part Number=RMCF1206JT620R, Military Standard=Not, Mount="Surface Mount", Number of Terminations=2, Packaging="Tape and Reel", Pricing 1="1=0.10000, 10=0.02700, 100=0.01100, 1000=0.00496, 2500=0.00430 (USD)", Radiation Hardening=No, Resistance=620R, RoHS=Yes, Stock 1=44910, Supplier 1=Digi-Key, Width=0.063inch
R4 R7 R10: library part CRGP1206F47K, "RS20-0400S4S4SDAPHHXX.X.", Manufacturer="TE Connectivity", Supplier Part Number 1=A130558CT-ND, Category="Chip SMD Resistors", Manufacturer Part Number=CRGP1206F47K, Pricing 1="1=0.31000, 10=0.26500, 100=0.10360, 1000=0.04338, 2500=0.03976 (USD)", RoHS=No, Stock 1=54190, Supplier 1=Digi-Key

## Via types
v1: diameter 0.6, hole 0.3, Top Layer to Bottom Layer, 7 vias
v2: diameter 0.6, hole 0.3, Top Layer to Bottom Layer, tented both sides, 1 vias

## Nets (pads, with @x,y where several pads share a name; then routed paths per layer and width w, separated by ;. In a path a pad name is that pad's centre, name@x,y a point inside that pad or via, vN(x,y) a via of type N, cw(c..) or ccw(c..) an arc to the next point about the centre after c; other vN are vias at no path point)
3.6V: ADJ1.4 C2.2 COMP1.4 COMP1.6 COMP1.8 R1.2 | length 29.9
  Top Layer w0.3: -9.7,13.9 -7.4,13.9 -6.4,12.9 -6.4,11.5 -5.1,10.2 C2.2@-4.4,10.2 ; ADJ1.4@-7.2,6 -7.2,6.55 -6.275,7.475 -5.525,7.475 -3.8,9.2 -3.8,10.1 C2.2 ; -3.85,9.15 -2.7,8 COMP1.4 1.619,7.981 2.319,7.981 4.7,5.6 ; COMP1.6 4.56,5.46 4.7,5.6 ; COMP1.8@7.069,4.175 7.035,4.209 6.091,4.209 4.7,5.6
4Vi: COMP1.9 P1.2 R9.1 | length 56.7
  Top Layer w0.3: P1.2 -14.9,-3.68 -14.9,-6 -13.8,-7.1 R9.1@-13,-7.1 ; v1@-12.9,-9.082 v1(-12.9,-9) R9.1 ; COMP1.9 7.04,5.5 v1(8.5,5.5) v1@8.6,5.5 ; COMP1.9@7.1,5.4 COMP1.9@7.5,5.4
  Bottom Layer w0.3: v1(-12.9,-9) -12.1,-9.8 11.461,-9.8 16.05,-5.211 16.05,-2.05 v1(8.5,5.5)
5V: 5VREG.3 AND1.5 J1.2 R4.2 R7.2 R10.2 | length 24
  Top Layer w0.3: 5VREG.3 10.7,4.2 10,4.9 R7.2 R10.2 R4.2 ; AND1.5 11.619,12.4 12.019,12 J1.2 14.35,12 15.15,12.8 16.4,12.8 17.5,11.7 17.5,8.3 16.5,7.3 16.5,7.15 16.15,6.8 R4.2@16,6.8
8Vi: P1.3 R5.1 R8.1 | length 6.7
  Top Layer w0.3: P1.3 -13.06,0.96 R5.1@-13,0.9 ; R8.1@-13,-1.8 -12.9,-1.7 R5.1
12Vi: 5VREG.1 ADJ1.3 C1.2 C3.2 C4.2 C5.2 COMP1.3 OA1.4 P1.4 R6.1 | length 110.4
  Top Layer w0.3: ADJ1.3@-13.6,4.8 -13.7,4.8 -15,3.5 ; v1(-6.1,-4.4) -4.25,-4.4 -4.15,-4.3 ; C1.2@-4.3,5.5 -4.3,5.15 -4.55,4.9 -5.25,4.9 -6.65,3.5 -15,3.5 ; C3.2 -4.2,-5.7 -4.15,-5.65 C3.2@-4.15,-5.5 ; C1.2@-4.2,5.95 C1.2@-4.2,6 ; R6.1 -4.15,-2.95 -4.15,-4.3 ; COMP1.3@0.9,9.3 0.275,9.925 -1.3,11.5 -4.2,11.5 -5.1,12.4 -5.1,13.8 -8.4,17.1 -13.5,17.1 -14.8,15.8 -14.8,8.35 -16.75,6.4 C5.2 P1.4 -15,3.5 ; OA1.4@1.6,-2.2 1.265,-2.2 0.475,-2.99 0.475,-3.849 0.024,-4.3 -2.7,-4.3 -3.6,-5.2 -3.85,-5.2 C3.2@-4.15,-5.5 ; C4.2 14.3,-6.25 15.3,-5.25 v1(15.3,-4.9) 5VREG.1 ; C3.2@-4.15,-5.5 -4.15,-4.3
  Bottom Layer w0.3: P1.4 -9.1,-4.4 v1(-6.1,-4.4) -1.3,-9.2 11,-9.2 v1(15.3,-4.9)
GND: 5VREG.2 5VREG.4 AND1.2 C1.1 C2.1 C3.1 C4.1 C5.1 COMP1.12 D1.2 OA1.11 P1.1 P2.2 R3.1 R12.2 R13.2
NetADJ1_1: ADJ1.1 R1.1 R3.2 | length 5.2
  Top Layer w0.3: R3.2 -12.9,11.9 ADJ1.1@-12.9,9.7 ; R3.2@-12.9,12 R1.1
NetAND1_1: AND1.1 COMP1.1 R7.1 | length 11.1
  Top Layer w0.3: COMP1.1@2.065,11.8 3.315,13.05 AND1.1 9.419,13.05 9.8,12.669 9.8,10.3 R7.1
NetAND1_3: AND1.3 COMP1.14 R10.1 | length 9.9
  Top Layer w0.3: COMP1.14 7.556,11.81 7.616,11.75 AND1.3 8.9,10.886 8.6,10.586 8.6,9.476 9.176,8.9 11.55,8.9 12.75,10.1 R10.1 ; R10.1@12.55,10.3 R10.1@13,10.3
NetAND1_4: AND1.4 COMP1.2 R4.1 | length 31.2
  Top Layer w0.3: v1(-2,12.4) -0.701,12.4 1.159,10.54 COMP1.2 ; AND1.4 11.35,11.75 12,11.1 14.75,11.1 15.75,10.1 R4.1 v1(16,11.6) v1@16,11.7
  Bottom Layer w0.3: v1(-2,12.4) -0.4,14 13.6,14 15.902,11.698 v1@15.998,11.698
NetAND1_6: AND1.6 J1.1 | length 3.8
  Top Layer w0.3: AND1.6 13.55,13.05 14.4,13.9 J1.1@14.5,13.9
NetCOMP1_5: COMP1.5 OA1.1 R2.2 | length 8.4
  Top Layer w0.3: OA1.1@1.6,1.6 1.58,1.62 1.175,1.62 0.545,2.25 -0.65,2.25 -0.9,2.5 -0.9,3 0.275,4.175 0.275,5.88 1.092,6.697 1.597,6.697 COMP1.5@1.6,6.7
NetCOMP1_7: COMP1.7 OA1.7 R11.1 | length 19.7
  Top Layer w0.3: R11.1@-1,-8.5 1.1,-8.5 1.1,-6.7 OA1.7@1.7,-6.1 ; v1@1.6,3 v1(1.6,3.1) COMP1.7
  Bottom Layer w0.3: v2(1.1,-7.85) 1.157,-7.793 1.557,-7.793 4.5,-4.85 4.5,0.2 v1(1.6,3.1)
NetOA1_2: OA1.2 R2.1 R5.2 | length 13.2
  Top Layer w0.3: R5.2 -6.4,0.8 -4.874,2.326 -4.45,2.326 -4.1,2.676 R2.1 ; R2.1@-4.1,2.5 -3.85,2.25 -3.6,2.25 -2.55,1.2 -0.272,1.2 0.628,0.3 OA1.2
NetOA1_3: OA1.3 R6.2 R12.1 | length 6
  Top Layer w0.3: R12.1 -1,-0.35 R12.1@-0.95,-0.4 ; R6.2 -0.95,-2.85 R12.1@-0.95,-0.4 ; R12.1@-0.9,-0.1 -0.95,-0.15 R12.1@-0.95,-0.4 ; OA1.3@1.6,-1 1.57,-0.97 -0.13,-0.97 -0.5,-0.6 -0.75,-0.6 R12.1@-0.95,-0.4
NetOA1_5: OA1.5 R8.2 R13.1 | length 28.6
  Top Layer w0.3: R8.2 -9.75,-1.95 -9.75,-4.45 -9.8,-4.5 -9.8,-4.65 -11.1,-5.95 -11.1,-7.586 -8.886,-9.8 1,-9.8 3.7,-7.1 3.7,-3.697 3.524,-3.521 1.711,-3.521 OA1.5
NetOA1_6: OA1.6 R9.2 R11.2 | length 13.9
  Top Layer w0.3: R9.2 -8.2,-7.1 -6.8,-8.5 -4.2,-8.5 -2.95,-8.5 -2.339,-7.889 -2.339,-7.811 -1.728,-7.2 -0.372,-7.2 0.3,-6.528 0.3,-5.705 1.205,-4.8 OA1.6@1.6,-4.8
TO_RELAY: D1.1 J1.3 P2.1 | length 15.4
  Top Layer w0.3: P2.1 3.2,16.3 D1.1@3.3,16.4 ; D1.1 3.75,16.2 5.175,14.775 11.825,14.775 12.5,14.1 J1.3@12.5,14
pads on no net: ADJ1.2 COMP1.10 COMP1.11 COMP1.13 OA1.8 OA1.9 OA1.10 OA1.12 OA1.13 OA1.14

## Polygon pours and split planes (outlines as drawn)
GND on Top Layer "GND_L01_P-001" (solid, remove dead copper, shelved, pour order 0): -19.6,-6.8 -14.4,-12 -9.1,-12.045 1.4,-11.99 2.99,-10.4 14.6,-10.4 19,-6 19,13.3 13.5,18.8 -13.8,18.8 -19.6,11.312

## Silkscreen, mask and mechanical layers (free items; w line width, h text height)
Top Overlay:
  text "12V" at -18.8,2.7 h0.8 r90
  text "8V" at -18.8,0.4 h0.8 r90
  text "4V" at -18.8,-2.1 h0.8 r90
  text "GND" at -18.8,-5.1 h0.8 r90